# EAGLE board RedBot-Panel-v14 (EAGLE 6.5.0)
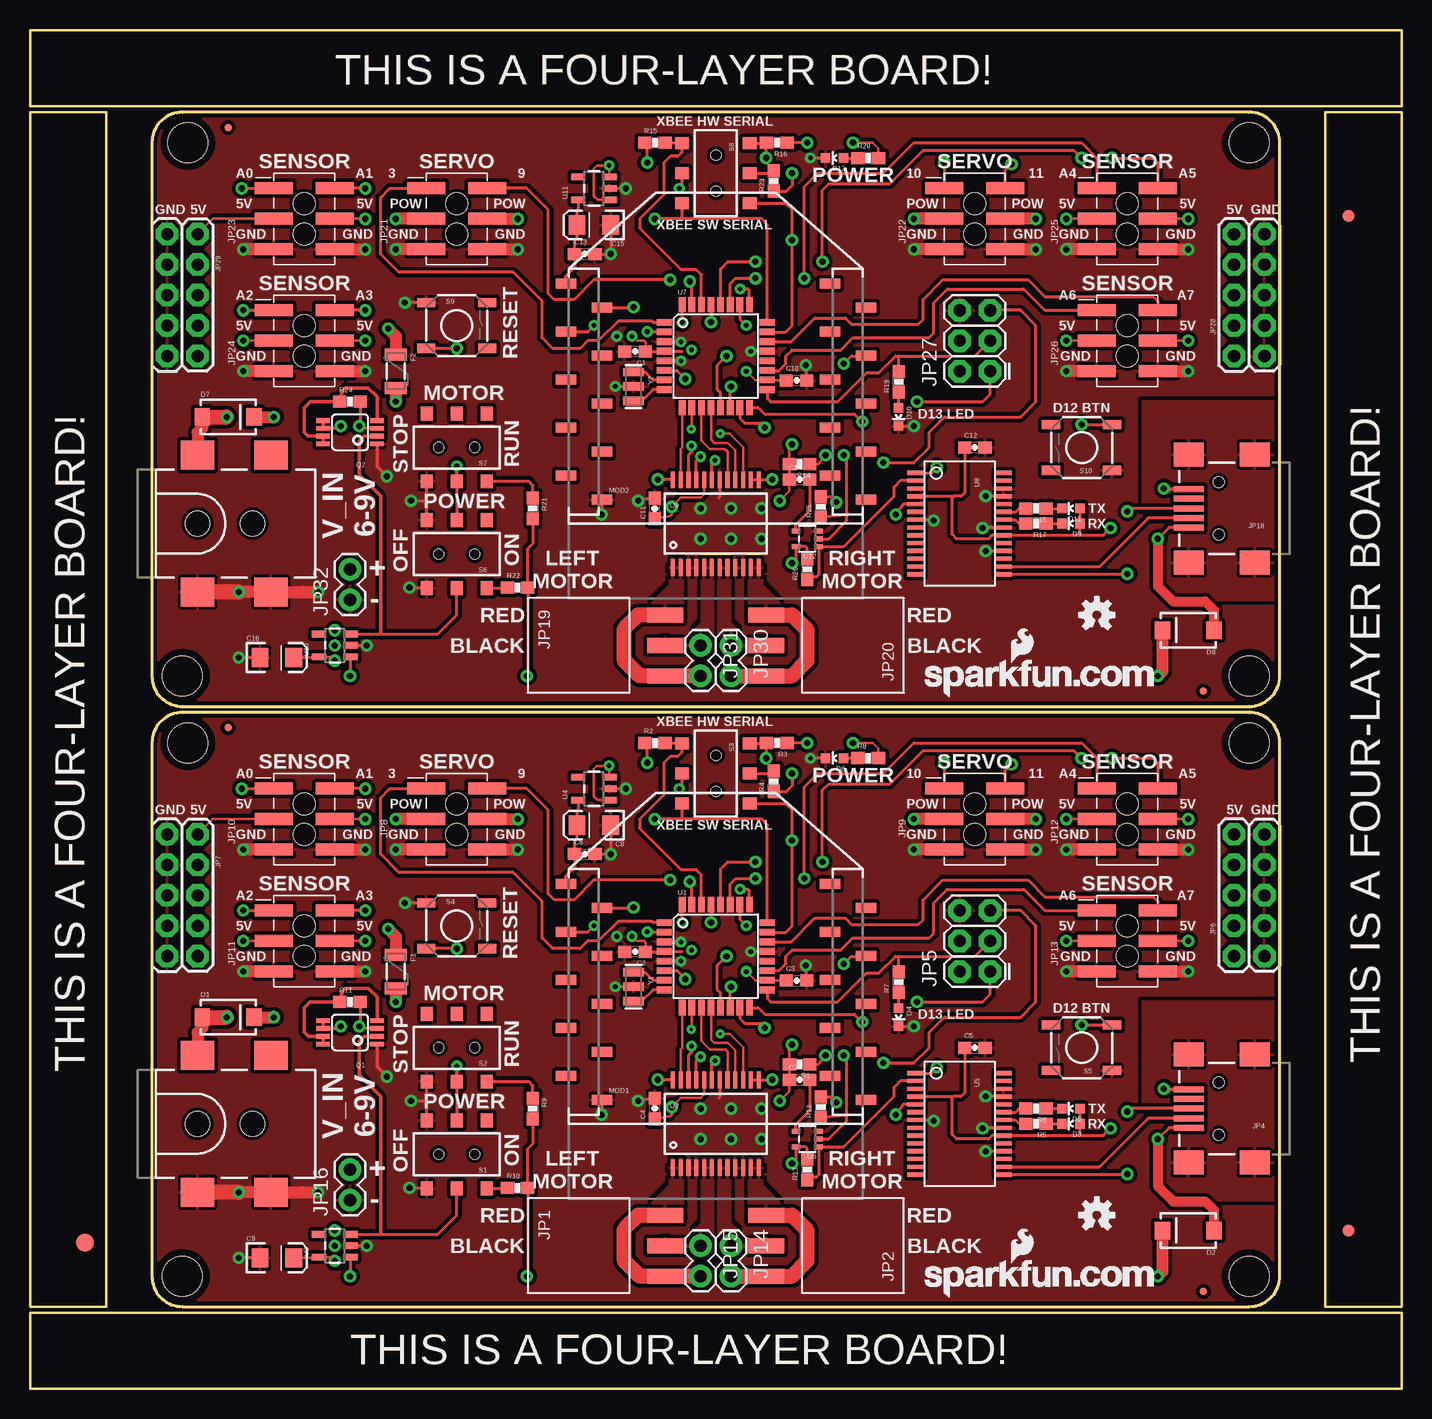
[diagram p0: board, top side]
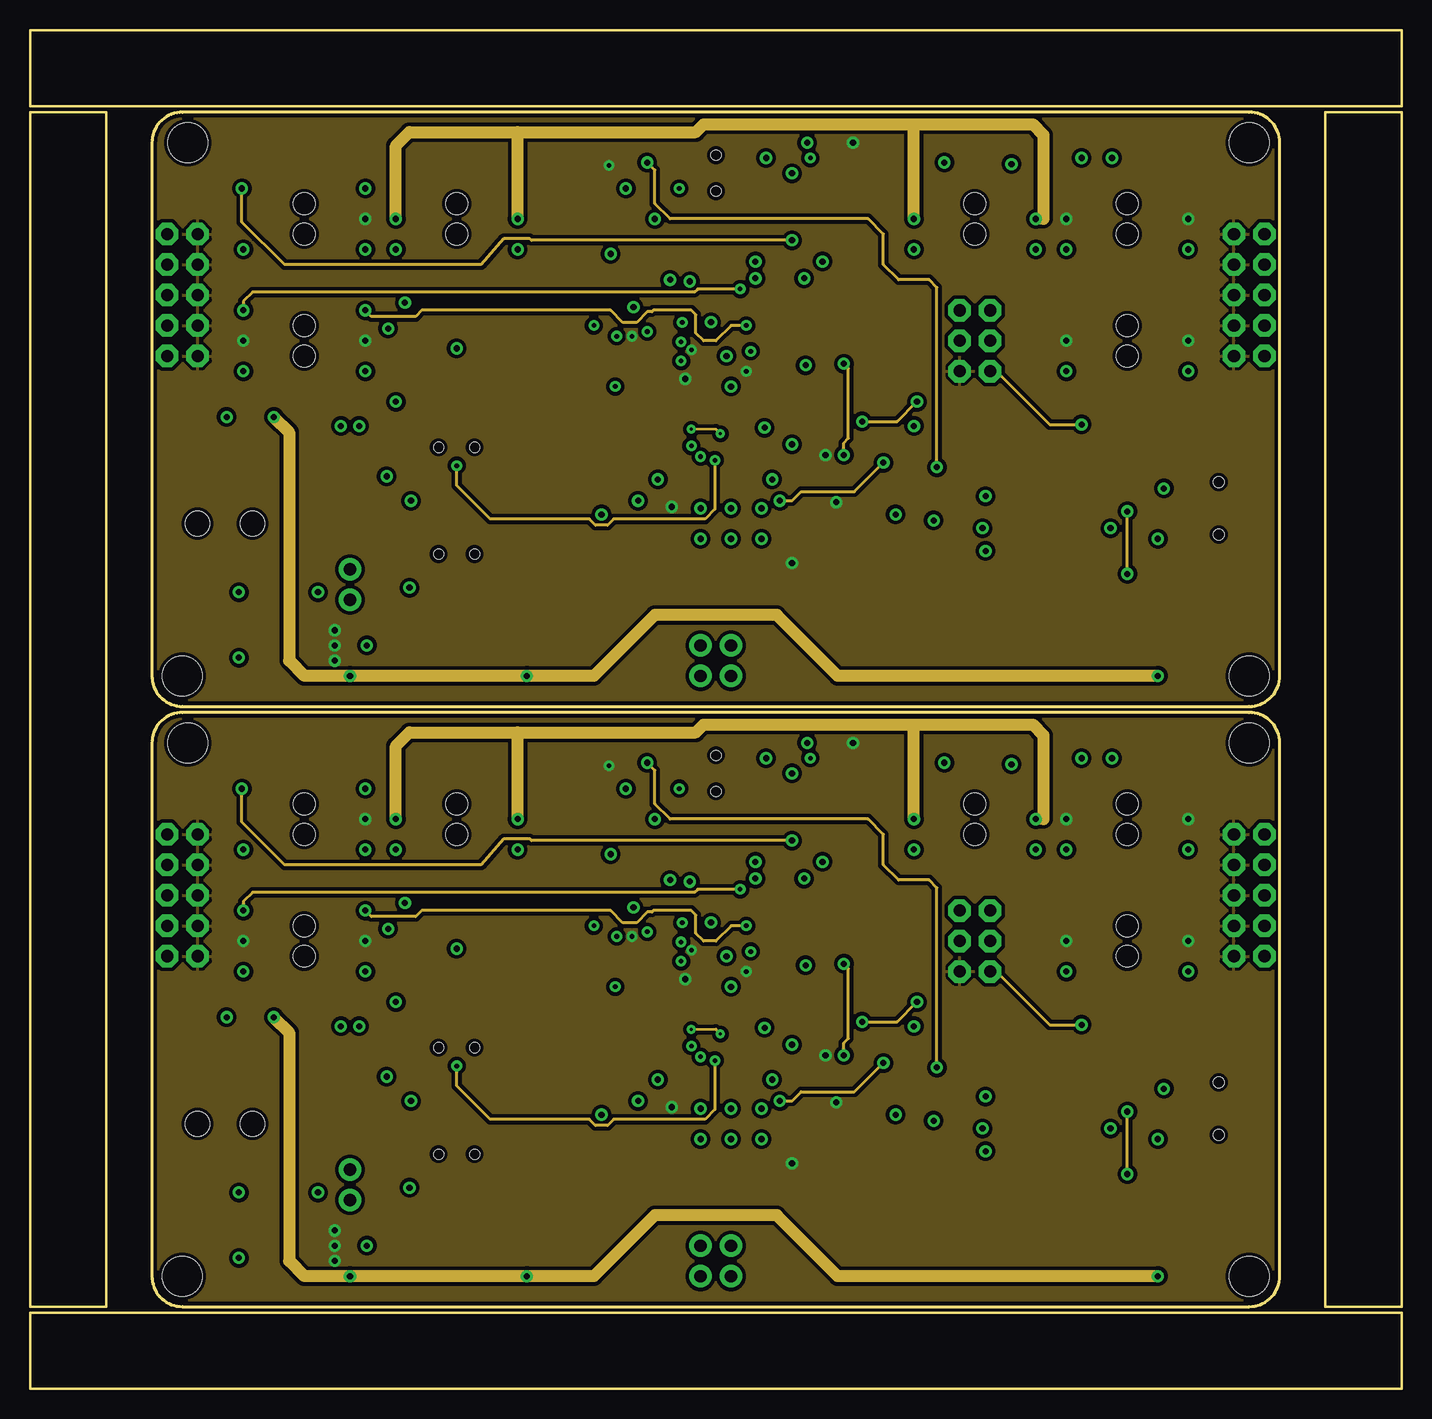
[diagram p1: board, inner layer 5V]
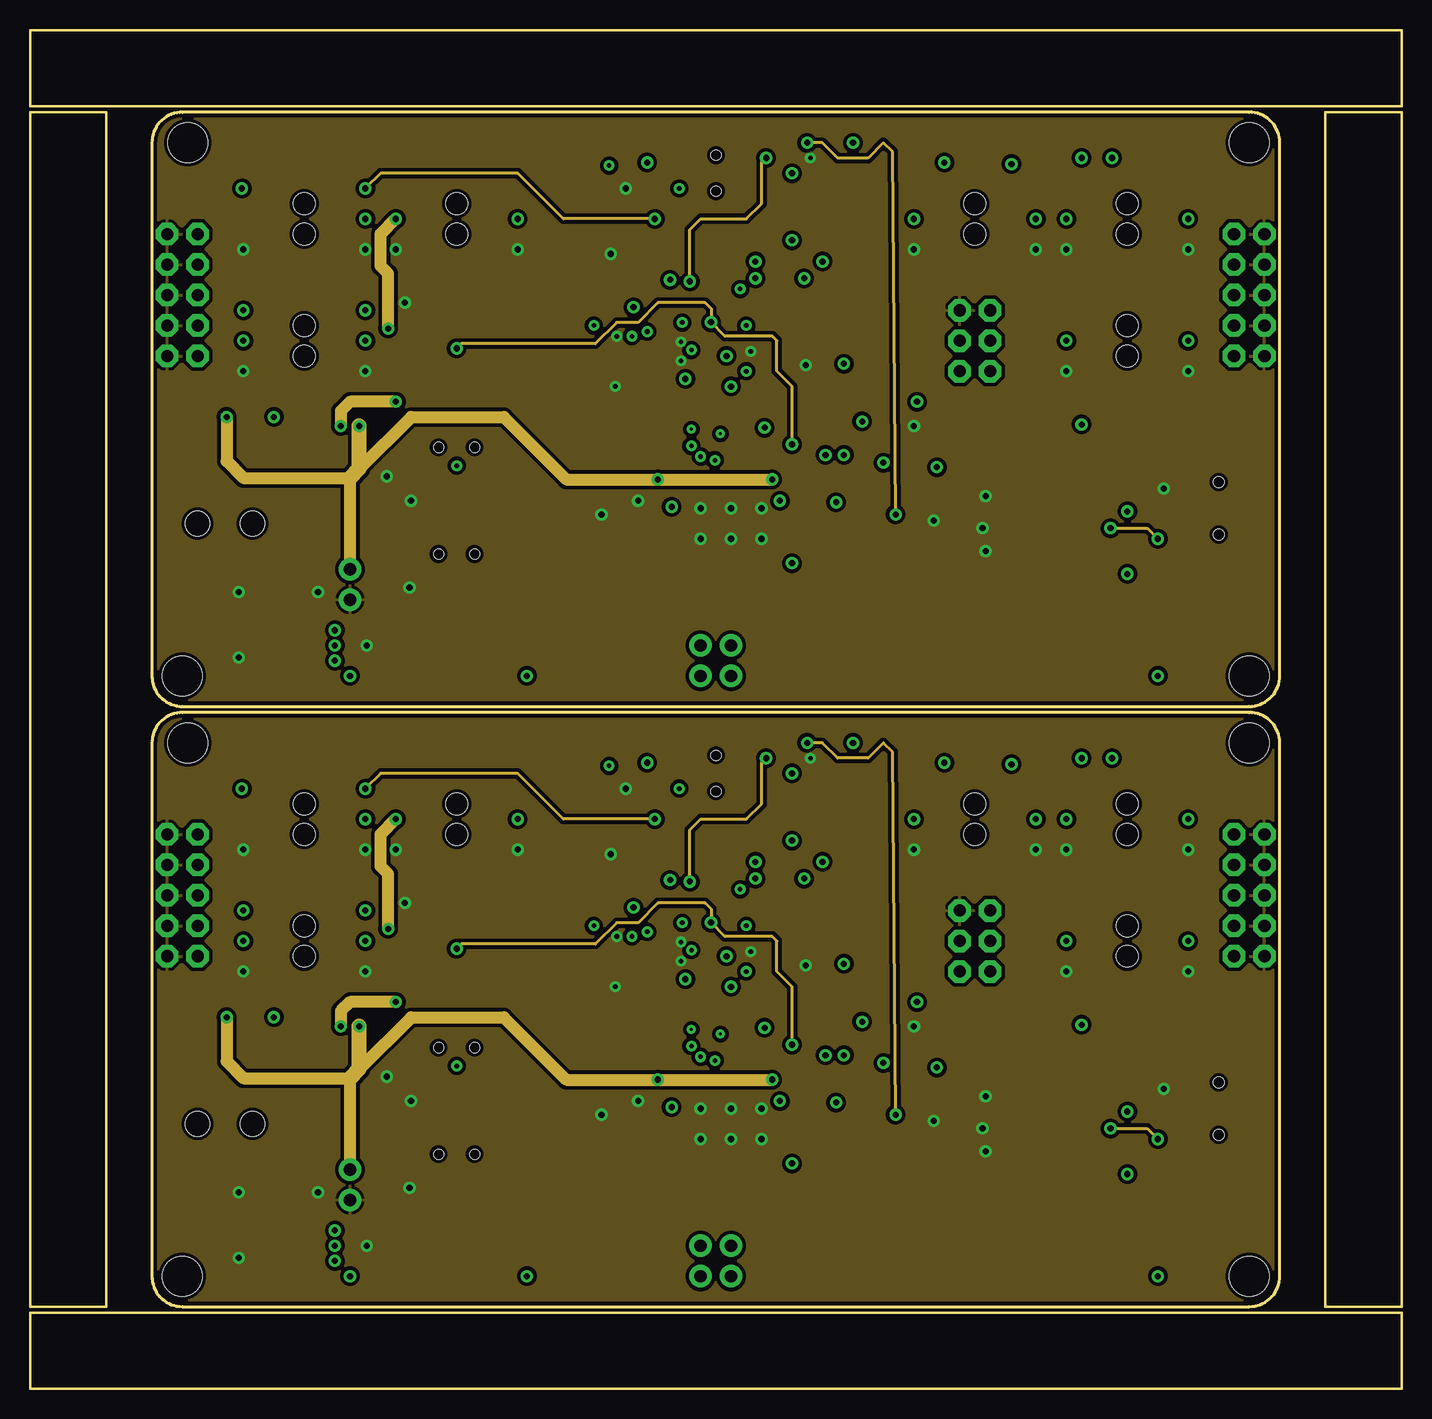
[diagram p2: board, inner layer Gnd]
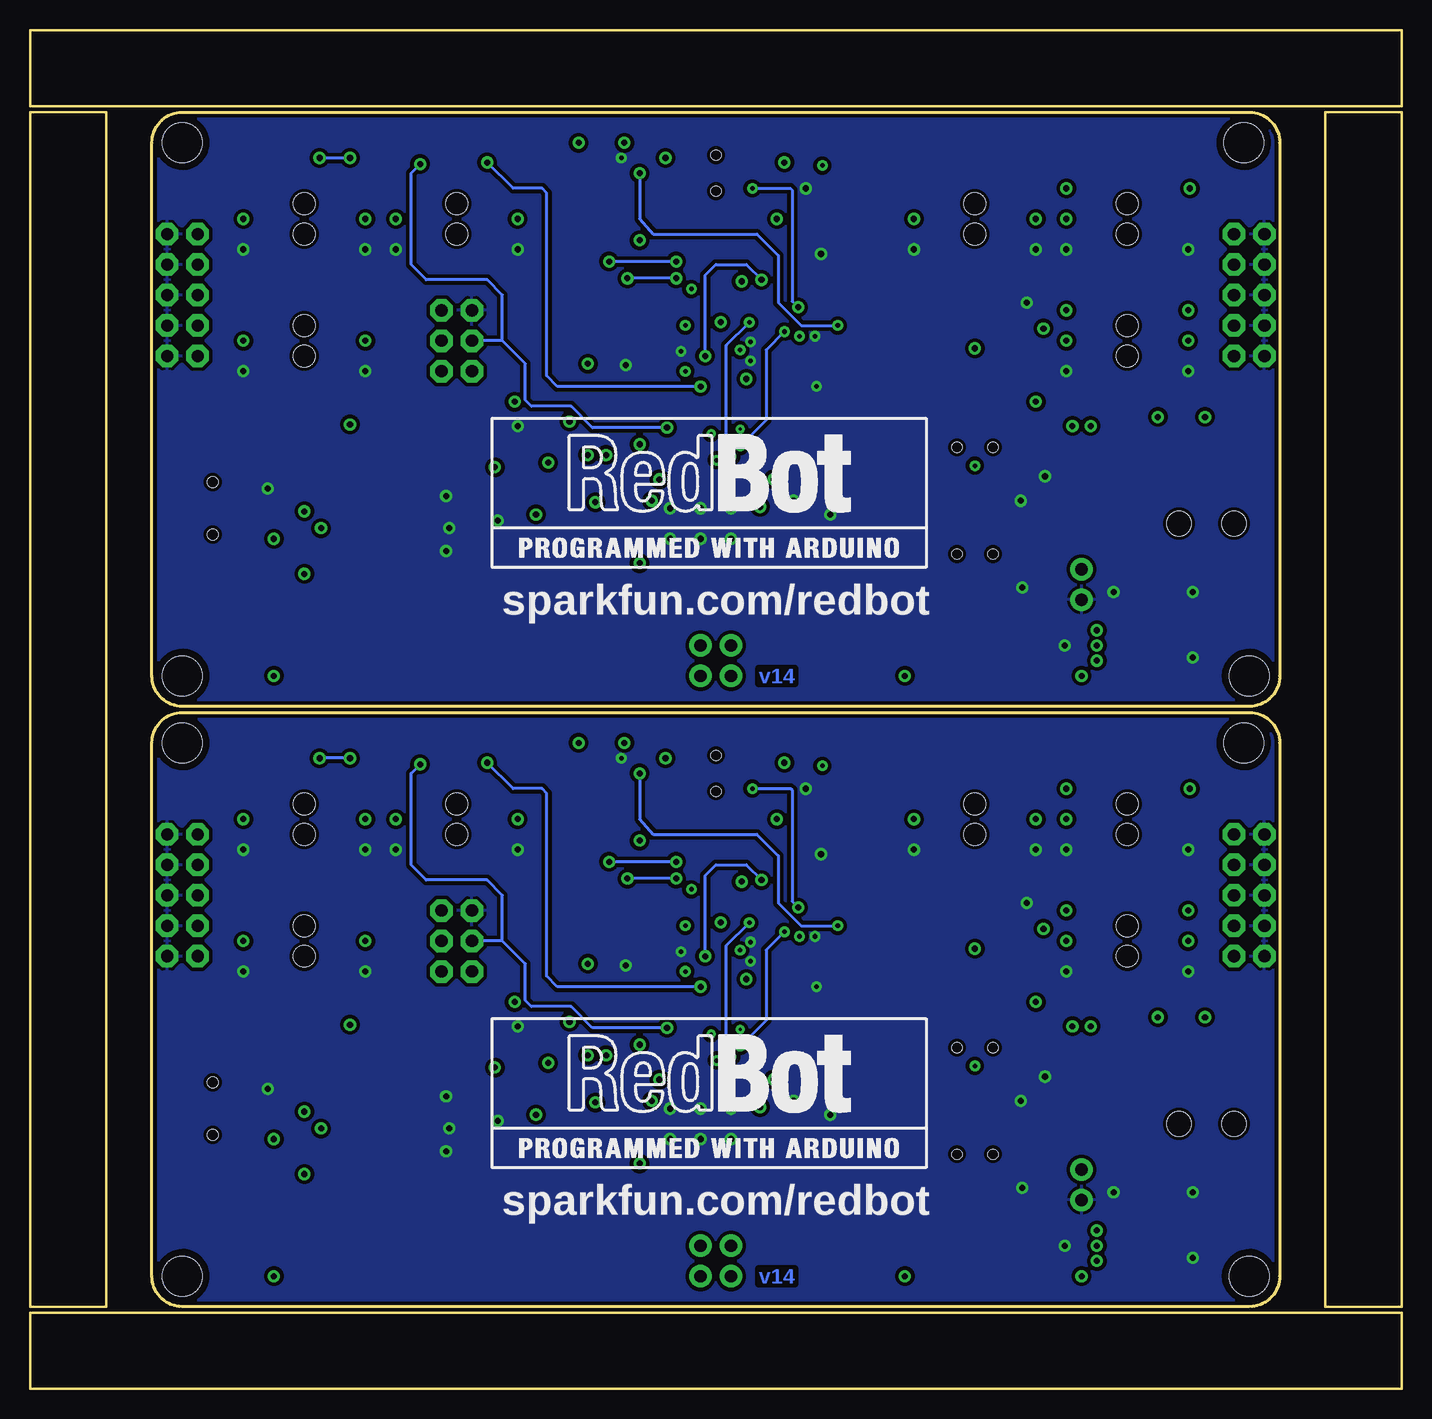
[diagram p3: board, bottom side, seen from below]

Size 114.3 x 113.28 mm. Coordinates in mm from the lower left corner, seen from the top.
Outline: 6.35,79.25 6.35,6.86 0,6.86 0,29.72
Outline: 114.3,79.25 114.3,6.86 107.95,6.86 107.95,29.72
Outline: 82.55,0 0,0 0,6.35 33.02,6.35
Outline: 31.75,6.35 114.3,6.35 114.3,0 81.28,0
Outline: 0,29.46 0,106.43 6.35,106.43 6.35,78.99
Outline: 107.95,29.21 107.95,106.43 114.3,106.43 114.3,78.74
Outline: 31.75,113.28 114.3,113.28 114.3,106.93 81.28,106.93
Outline: 82.55,106.93 0,106.93 0,113.28 33.02,113.28
Outline: 10.16,53.85 10.16,9.4 arc90 12.7,6.86 101.6,6.86 arc90 104.14,9.4 104.14,53.85 arc90 101.6,56.39 12.7,56.39 arc90 10.16,53.85
Outline: 10.16,103.89 10.16,59.44 arc90 12.7,56.9 101.6,56.9 arc90 104.14,59.44 104.14,103.89 arc90 101.6,106.43 12.7,106.43 arc90 10.16,103.89
Copper layers (1*2+15*16): Top 0.035mm / dielectric 1.5mm / 5V 0.035mm / dielectric 0.15mm / Gnd 0.035mm / dielectric 0.2mm / Bottom 0.035mm
Design rules "Sparkfun *": minimum track width 8mil, minimum drill 15mil, track to track 8mil, track to pad 8mil, pad to pad 8mil, via to via 8mil, smd to smd 8mil, copper to edge 8mil, drill to drill 8mil, minimum pad ring 12mil, minimum via ring 10mil, stop-mask expansion 4mil, vias tented up to drill 20mil, thermal gap 10mil

## Footprints (pad centres in the part's own frame; a part is rotated, then mirrored left to right if it is on the bottom)
0603-CAP = smd 1.1 x 1: 1 -0.85,0; 2 0.85,0
EIA3216 = smd 1.4 x 1.6: A 1.4,0; C -1.4,0
SMA-DIODE = smd 1.27 x 1.47: A -2.15,0; C 2.15,0
LED-0603 = smd 0.8 x 0.8: A 0,-0.75; C 0,0.75
FIDUCIAL-1.5X3 = smd 1.5 x 1.5: 1 0,0
FIDUCIAL-1X2 = smd 1 x 1: 1 0,0
PTC-1206 = smd 1 x 1.8: 1 -1.4,0; 2 1.4,0
MICRO-FIDUCIAL = smd 0.635 x 0.635: 1 0,0
1X03_SMD_RA_FEMALE = smd 1.25 x 3: 1 -2.54,7.225; 2 0,7.225; 3 2.54,7.225
POWER_JACK_SMD = smd 2.8 x 2.4: GND 0,-5.7; P$4 6.1,-5.7; VIN0 0,5.7; VIN1 6.1,5.7 | hole 2.032: 0,0; 4.572,0
USB-MINIB = smd 2.5 x 0.5: D+ 2.5,0; D- 2.5,0.8; GND 2.5,-1.6; ID 2.5,-0.8; VBUS 2.5,1.6 | smd 2.5 x 2: MTN1 -3,4.5; MTN2 2.5,4.5; MTN3 -3,-4.5; MTN4 2.5,-4.5 | hole 0.9: 0,2.2; 0,-2.2
2X3 = drill 1.016 pad 1.88 octagon: 1 0,0; 2 0,2.54; 3 2.54,0; 4 2.54,2.54; 5 5.08,0; 6 5.08,2.54
2X5_NOSILK = drill 1.016 pad 1.88 octagon: 1 -1.27,5.08; 2 1.27,5.08; 3 -1.27,2.54; 4 1.27,2.54; 5 -1.27,0; 6 1.27,0; 7 -1.27,-2.54; 8 1.27,-2.54; 9 -1.27,-5.08; 10 1.27,-5.08
2X3_SMT_POSTS = smd 1 x 3.17: 1 -2.54,-2.54; 2 -2.54,2.54; 3 0,-2.54; 4 0,2.54; 5 2.54,-2.54; 6 2.54,2.54 | hole 1.8: -1.27,0; 1.27,0
1X02 = drill 1.016 pad 1.88: 1 0,0; 2 2.54,0
XBEE-SMD = smd 1.7 x 0.85: 1 -12.5,20; 2 -9.5,18; 3 -12.5,16; 4 -9.5,14; 5 -12.5,12; 6 -9.5,10; 7 -12.5,8; 8 -9.5,6; 9 -12.5,4; 10 -9.5,2; 11 12.5,2; 12 9.5,4; 13 12.5,6; 14 9.5,8; 15 12.5,10; 16 9.5,12; 17 12.5,14; 18 9.5,16; 19 12.5,18; 20 9.5,20
MSOP8 = smd 0.4 x 1.1: 1 -0.975,-2.25; 2 -0.325,-2.25; 3 0.325,-2.25; 4 0.975,-2.25; 5 0.975,2.25; 6 0.325,2.25; 7 -0.325,2.25; 8 -0.975,2.25
0603-RES = smd 1.1 x 1: 1 -0.85,0; 2 0.85,0
AYZ0202 = smd 1 x 1.15: 1 -2.5,2.825; 2 0,2.825; 3 2.5,2.825; 4 -2.5,-2.825; 5 0,-2.825; 6 2.5,-2.825 | hole 0.85: 1.5,0; -1.5,0
TACTILE_SWITCH_SMD = smd 1.524 x 0.762: 1 -2.54,1.905; 2 2.54,1.905; 3 -2.54,-1.905; 4 2.54,-1.905
STAND-OFF = hole 3.302: 0,0
TQFP32-08 = smd 1.27 x 0.559: 1 -4.293,2.8; 2 -4.293,2; 3 -4.293,1.2; 4 -4.293,0.4; 5 -4.293,-0.4; 6 -4.293,-1.2; 7 -4.293,-2; 8 -4.293,-2.8; 17 4.293,-2.8; 18 4.293,-2; 19 4.293,-1.2; 20 4.293,-0.4; 21 4.293,0.4; 22 4.293,1.2; 23 4.293,2; 24 4.293,2.8 | smd 0.559 x 1.27: 9 -2.8,-4.293; 10 -2,-4.293; 11 -1.2,-4.293; 12 -0.4,-4.293; 13 0.4,-4.293; 14 1.2,-4.293; 15 2,-4.293; 16 2.8,-4.293; 25 2.8,4.293; 26 2,4.293; 27 1.2,4.293; 28 0.4,4.293; 29 -0.4,4.293; 30 -1.2,4.293; 31 -2,4.293; 32 -2.8,4.293
SSOP24 = smd 0.348 x 1.397: 1 -3.575,-3.656; 2 -2.925,-3.656; 3 -2.275,-3.656; 4 -1.625,-3.656; 5 -0.975,-3.656; 6 -0.325,-3.656; 7 0.325,-3.656; 8 0.975,-3.656; 9 1.625,-3.656; 10 2.275,-3.656; 11 2.925,-3.656; 12 3.575,-3.656; 13 3.575,3.656; 14 2.925,3.656; 15 2.275,3.656; 16 1.625,3.656; 17 0.975,3.656; 18 0.325,3.656; 19 -0.325,3.656; 20 -0.975,3.656; 21 -1.625,3.656; 22 -2.275,3.656; 23 -2.925,3.656; 24 -3.575,3.656
SOT23-5 = smd 0.55 x 1.2: 1 -0.95,-1.3; 2 0,-1.3; 3 0.95,-1.3; 4 0.95,1.3; 5 -0.95,1.3
SSOP28DB = smd 0.348 x 1.397: 1 -4.225,-3.656; 2 -3.575,-3.656; 3 -2.925,-3.656; 4 -2.275,-3.656; 5 -1.625,-3.656; 6 -0.975,-3.656; 7 -0.325,-3.656; 8 0.325,-3.656; 9 0.975,-3.656; 10 1.625,-3.656; 11 2.275,-3.656; 12 2.925,-3.656; 13 3.575,-3.656; 14 4.225,-3.656; 15 4.225,3.656; 16 3.575,3.656; 17 2.925,3.656; 18 2.275,3.656; 19 1.625,3.656; 20 0.975,3.656; 21 0.325,3.656; 22 -0.325,3.656; 23 -0.975,3.656; 24 -1.625,3.656; 25 -2.275,3.656; 26 -2.925,3.656; 27 -3.575,3.656; 28 -4.225,3.656
SOT353 = smd 0.42 x 0.7: 1 -0.65,-0.95; 2 0,-0.95; 3 0.65,-0.95; 4 0.65,0.95; 5 -0.65,0.95
RESONATOR-SMD = smd 0.7 x 1.7: 1 -1.2,0; 2 0,0; 3 1.2,0

## Placement (x,y rotation side)
C1  0.1uF  [0603-CAP]  50.42,86.49 180 top
C2  0.1uF  [0603-CAP]  50.42,36.45 180 top
C3  0.1uF  [0603-CAP]  63.88,34.04 0 top
C4  0.1uF  [0603-CAP]  52.07,23.37 90 top
C5  0.1uF  [0603-CAP]  78.74,28.45 0 top
C6  0.1uF  [0603-CAP]  46.23,44.58 0 top
C7  0.1uF  [0603-CAP]  64.14,25.78 0 top
C8  10uF  [EIA3216]  46.99,46.99 180 top
C9  10uF  [EIA3216]  20.57,10.92 0 top
C10  0.1uF  [0603-CAP]  63.88,84.07 0 top
C11  0.1uF  [0603-CAP]  52.07,73.41 90 top
C12  0.1uF  [0603-CAP]  78.74,78.49 0 top
C13  0.1uF  [0603-CAP]  46.23,94.61 0 top
C14  0.1uF  [0603-CAP]  64.14,75.82 0 top
C15  10uF  [EIA3216]  46.99,97.03 180 top
C16  10uF  [EIA3216]  20.57,60.96 0 top
D1  [SMA-DIODE]  16.51,30.99 0 top
D2  [SMA-DIODE]  96.52,13.21 180 top
D3  GREEN  [LED-0603]  86.74,22.1 90 top
D4  GREEN  [LED-0603]  72.39,30.99 180 top
D5  GREEN  [LED-0603]  86.74,23.37 90 top
D6  GREEN  [LED-0603]  67.06,52.58 90 top
D7  [SMA-DIODE]  16.51,81.03 0 top
D8  [SMA-DIODE]  96.52,63.25 180 top
D9  GREEN  [LED-0603]  86.74,72.14 90 top
D10  GREEN  [LED-0603]  72.39,81.03 180 top
D11  GREEN  [LED-0603]  86.74,73.41 90 top
D12  GREEN  [LED-0603]  67.06,102.62 90 top
E$1  [FIDUCIAL-1.5X3]  4.57,12.19 0 top
E$2  [FIDUCIAL-1X2]  109.86,13.21 0 top
E$6  [FIDUCIAL-1X2]  109.86,97.79 180 top
F1  PTCSMD  [PTC-1206]  30.48,34.8 270 top
F2  PTCSMD  [PTC-1206]  30.48,84.84 270 top
FID1  FIDUCIALUFIDUCIAL  [MICRO-FIDUCIAL]  16.51,55.12 0 top
FID2  FIDUCIALUFIDUCIAL  [MICRO-FIDUCIAL]  97.79,8.13 0 top
FID3  FIDUCIALUFIDUCIAL  [MICRO-FIDUCIAL]  16.51,105.16 0 top
FID4  FIDUCIALUFIDUCIAL  [MICRO-FIDUCIAL]  97.79,58.17 0 top
JP1  1x3 RA Female .1"  [1X03_SMD_RA_FEMALE]  45.72,11.94 270 top
JP2  1x3 RA Female .1"  [1X03_SMD_RA_FEMALE]  68.58,11.94 90 top
JP3  5.5x2.1mm Barrel  [POWER_JACK_SMD]  13.97,22.1 0 top
JP4  USB-B  [USB-MINIB]  99.06,23.37 180 top
JP5  AVR_SPI_PRG_6PTH  [2X3]  80.01,34.8 90 top
JP6  M05X2NO_SILK  [2X5_NOSILK]  101.6,41.15 0 top
JP7  M05X2NO_SILK  [2X5_NOSILK]  12.7,41.15 180 top
JP8  [2X3_SMT_POSTS]  35.56,47.5 270 top
JP9  [2X3_SMT_POSTS]  78.74,47.5 270 top
JP10  [2X3_SMT_POSTS]  22.86,47.5 270 top
JP11  [2X3_SMT_POSTS]  22.86,37.34 270 top
JP12  [2X3_SMT_POSTS]  91.44,47.5 270 top
JP13  [2X3_SMT_POSTS]  91.44,37.34 270 top
JP14  [1X02]  58.42,11.94 270 top
JP15  [1X02]  55.88,11.94 270 top
JP16  [1X02]  26.67,15.75 90 top
JP17  5.5x2.1mm Barrel  [POWER_JACK_SMD]  13.97,72.14 0 top
JP18  USB-B  [USB-MINIB]  99.06,73.41 180 top
JP19  1x3 RA Female .1"  [1X03_SMD_RA_FEMALE]  45.72,61.98 270 top
JP20  1x3 RA Female .1"  [1X03_SMD_RA_FEMALE]  68.58,61.98 90 top
JP21  [2X3_SMT_POSTS]  35.56,97.54 270 top
JP22  [2X3_SMT_POSTS]  78.74,97.54 270 top
JP23  [2X3_SMT_POSTS]  22.86,97.54 270 top
JP24  [2X3_SMT_POSTS]  22.86,87.38 270 top
JP25  [2X3_SMT_POSTS]  91.44,97.54 270 top
JP26  [2X3_SMT_POSTS]  91.44,87.38 270 top
JP27  AVR_SPI_PRG_6PTH  [2X3]  80.01,84.84 90 top
JP28  M05X2NO_SILK  [2X5_NOSILK]  101.6,91.19 0 top
JP29  M05X2NO_SILK  [2X5_NOSILK]  12.7,91.19 180 top
JP30  [1X02]  58.42,61.98 270 top
JP31  [1X02]  55.88,61.98 270 top
JP32  [1X02]  26.67,65.79 90 top
MOD1  XBEE-1B3  [XBEE-SMD]  57.15,22.1 0 top
MOD2  XBEE-1B3  [XBEE-SMD]  57.15,72.14 0 top
Q1  [MSOP8]  26.67,29.72 90 top
Q2  [MSOP8]  26.67,79.76 90 top
R1  10k  [0603-RES]  64.14,27.05 180 top
R2  1k  [0603-RES]  52.07,53.85 0 top
R3  1k  [0603-RES]  62.23,53.85 180 top
R4  1k  [0603-RES]  61.98,50.67 90 top
R5  1k  [0603-RES]  83.82,22.1 180 top
R6  1k  [0603-RES]  83.82,23.37 180 top
R7  1k  [0603-RES]  72.39,33.91 90 top
R8  1k  [0603-RES]  69.85,52.58 0 top
R9  10k  [0603-RES]  41.91,23.37 270 top
R10  10k  [0603-RES]  40.64,16.76 0 top
R11  10k  [0603-RES]  26.67,32.26 0 top
R12  10k  [0603-RES]  65.91,23.5 90 top
R13  10k  [0603-RES]  64.77,18.29 90 top
R14  10k  [0603-RES]  64.14,77.09 180 top
R15  1k  [0603-RES]  52.07,103.89 0 top
R16  1k  [0603-RES]  62.23,103.89 180 top
R17  1k  [0603-RES]  83.82,72.14 180 top
R18  1k  [0603-RES]  83.82,73.41 180 top
R19  1k  [0603-RES]  72.39,83.95 90 top
R20  1k  [0603-RES]  69.85,102.62 0 top
R21  10k  [0603-RES]  41.91,73.41 270 top
R22  10k  [0603-RES]  40.64,66.8 0 top
R23  1k  [0603-RES]  61.98,100.71 90 top
R24  10k  [0603-RES]  26.67,82.3 0 top
R25  10k  [0603-RES]  65.91,73.53 90 top
R26  10k  [0603-RES]  64.77,68.33 90 top
S1  DPDT  [AYZ0202]  35.56,19.56 180 top
S2  DPDT  [AYZ0202]  35.56,28.45 180 top
S3  DPDT  [AYZ0202]  57.15,51.31 270 top
S4  [TACTILE_SWITCH_SMD]  35.56,38.61 0 top
S5  [TACTILE_SWITCH_SMD]  87.63,28.45 180 top
S6  DPDT  [AYZ0202]  35.56,69.6 180 top
S7  DPDT  [AYZ0202]  35.56,78.49 180 top
S8  DPDT  [AYZ0202]  57.15,101.35 270 top
S9  [TACTILE_SWITCH_SMD]  35.56,88.65 0 top
S10  [TACTILE_SWITCH_SMD]  87.63,78.49 180 top
SFE-LOGO1  LOGO-SFENEW  [SFE-NEW-WEBLOGO]  74.55,7.62 0 top
SFE-LOGO2  LOGO-SFENEW  [SFE-NEW-WEBLOGO]  74.55,57.66 0 top
STANDOFF1  STAND-OFF  [STAND-OFF]  101.6,9.4 0 top
STANDOFF2  STAND-OFF  [STAND-OFF]  13.15,53.85 0 top
STANDOFF3  STAND-OFF  [STAND-OFF]  12.7,9.4 0 top
STANDOFF4  STAND-OFF  [STAND-OFF]  101.6,53.85 0 top
STANDOFF5  STAND-OFF  [STAND-OFF]  101.6,59.44 0 top
STANDOFF6  STAND-OFF  [STAND-OFF]  13.15,103.89 0 top
STANDOFF7  STAND-OFF  [STAND-OFF]  12.7,59.44 0 top
STANDOFF8  STAND-OFF  [STAND-OFF]  101.6,103.89 0 top
U1  ATMEGA328P  [TQFP32-08]  57.15,36.07 0 top
U2  TB6612FNG  [SSOP24]  57.15,22.1 0 top
U3  MIC5219 5V  [SOT23-5]  25.4,11.94 90 top
U4  MIC5219 3.3V  [SOT23-5]  46.99,50.04 90 top
U5  FT232RLSSOP  [SSOP28DB]  77.47,22.1 270 top
U6  7408SE  [SOT353]  64.77,20.83 90 top
U7  ATMEGA328P  [TQFP32-08]  57.15,86.11 0 top
U8  FT232RLSSOP  [SSOP28DB]  77.47,72.14 270 top
U9  TB6612FNG  [SSOP24]  57.15,72.14 0 top
U10  MIC5219 5V  [SOT23-5]  25.4,61.98 90 top
U11  MIC5219 3.3V  [SOT23-5]  46.99,100.08 90 top
U12  7408SE  [SOT353]  64.77,70.87 90 top
U$1  OSHW-LOGOS  [OSHW-LOGO-S]  88.9,64.52 0 top
U$2  REDBOT_LOGO  [REDBOT_LOGO]  75.95,68.33 0 bottom
U$17  OSHW-LOGOS  [OSHW-LOGO-S]  88.9,14.48 0 top
U$23  REDBOT_LOGO  [REDBOT_LOGO]  75.95,18.29 0 bottom
Y1  16MHz  [RESONATOR-SMD]  50.29,33.53 270 top
Y2  16MHz  [RESONATOR-SMD]  50.29,83.57 270 top

## Library data of the parts
C1-C7 C10-C14 = SparkFun-Capacitors; PROD_ID: CAP-00810
C8 C9 C15 C16 = SparkFun-Capacitors; PROD_ID: CAP-00811
D1 D2 D7 D8 = SparkFun-DiscreteSemi; PROD_ID: DIO-09886
D3-D6 D9-D12 = SparkFun-LED; PROD_ID: DIO-00821
E$1 E$2 E$6 FID1-FID4 SFE-LOGO1 SFE-LOGO2 U$1 U$2 U$17 U$23 = SparkFun-Aesthetics
F1 F2 = SparkFun-PowerIC; PROD_ID: RES-11150
JP1 JP2 JP19 JP20 = SparkFun-Connectors; PROD_ID: CONN-10926
JP3 JP17 = SparkFun-Connectors; PROD_ID: CONN-08106
JP4-JP7 JP14-JP16 JP18 JP27-JP32 = SparkFun-Connectors
JP8-JP13 JP21-JP26 = SparkFun-Connectors; PROD_ID: CONN-11415
MOD1 MOD2 = SparkFun-RF; PROD_ID: CONN-09042
Q1 Q2 = SparkFun-DiscreteSemi; PROD_ID: TRANS-07913
R1 R9-R14 R21 R22 R24-R26 = SparkFun-Resistors; PROD_ID: RES-00824
R2-R8 R15-R20 R23 = SparkFun-Resistors; PROD_ID: RES-07856
S1-S3 S6-S8 = SparkFun-Electromechanical; PROD_ID: SWCH-08179
S4 S5 S9 S10 = SparkFun-Electromechanical; PROD_ID: SWCH-08247
STANDOFF1-STANDOFF8 = SparkFun-Electromechanical
U1 U7 = SparkFun-DigitalIC; PROD_ID: IC-09069
U2 U9 = SparkFun-PowerIC; PROD_ID: IC-09363
U3 U10 = SparkFun-PowerIC; PROD_ID: VREG-10107
U4 U11 = SparkFun-PowerIC; PROD_ID: VREG-09872
U5 U8 = SparkFun-DigitalIC; PROD_ID: IC-00870
U6 U12 = SparkFun-DigitalIC; PROD_ID: IC-10841
Y1 Y2 = SparkFun-FreqCtrl; PROD_ID: XTAL-08900

## Nets
3.3V: C6.1 C8.A MOD1.1 U4.5
3.3V1: C13.1 C15.A MOD2.1 U11.5
5V: C2.1 C3.1 C4.1 C9.A JP5.2 JP6.1 JP6.3 JP6.5 JP6.7 JP6.9 JP7.1 JP7.3 JP7.5 JP7.7 JP7.9 JP10.3 JP10.4 JP11.3 JP11.4 JP12.3 JP12.4 JP13.3 JP13.4 R1.1 R8.2 R12.2 R13.2 U1.4 U1.6 U1.18 U2.20 U3.5 U4.1 U4.3 U6.5
5V1: C1.1 C10.1 C11.1 C16.A JP23.3 JP23.4 JP24.3 JP24.4 JP25.3 JP25.4 JP26.3 JP26.4 JP27.2 JP28.1 JP28.3 JP28.5 JP28.7 JP28.9 JP29.1 JP29.3 JP29.5 JP29.7 JP29.9 R14.1 R20.2 R25.2 R26.2 U7.4 U7.6 U7.18 U9.20 U10.5 U11.1 U11.3 U12.5
AREF: U1.20
AREF1: U7.20
FT232_RXI: R3.1 U5.5
FT232_RXI1: R16.1 U8.5
FT232_TXO: R2.1 U5.1
FT232_TXO1: R15.1 U8.1
FTDI_DTR: R13.1 U5.2 U6.1
FTDI_DTR1: R26.1 U8.2 U12.1
GND: C2.2 C3.2 C4.2 C5.2 C6.2 C8.C C9.C D4.C D6.C JP3.GND JP3.P$4 JP4.GND JP5.6 JP6.2 JP6.4 JP6.6 JP6.8 JP6.10 JP7.2 JP7.4 JP7.6 JP7.8 JP7.10 JP8.5 JP8.6 JP9.5 JP9.6 JP10.5 JP10.6 JP11.5 JP11.6 JP12.5 JP12.6 JP13.5 JP13.6 JP16.1 MOD1.10 Q1.1 S1.3 S1.6 S2.3 S4.1 S5.1 U1.3 U1.5 U1.21 U2.3 U2.4 U2.9 U2.10 U2.18 U3.2 U4.2 U5.7 U5.18 U5.21 U5.25 U5.26 U6.3 Y1.2
GND1: C1.2 C10.2 C11.2 C12.2 C13.2 C15.C C16.C D10.C D12.C JP17.GND JP17.P$4 JP18.GND JP21.5 JP21.6 JP22.5 JP22.6 JP23.5 JP23.6 JP24.5 JP24.6 JP25.5 JP25.6 JP26.5 JP26.6 JP27.6 JP28.2 JP28.4 JP28.6 JP28.8 JP28.10 JP29.2 JP29.4 JP29.6 JP29.8 JP29.10 JP32.1 MOD2.10 Q2.1 S6.3 S6.6 S7.3 S9.1 S10.1 U7.3 U7.5 U7.21 U8.7 U8.18 U8.21 U8.25 U8.26 U9.3 U9.4 U9.9 U9.10 U9.18 U10.2 U11.2 U12.3 Y2.2
L01: JP1.1 JP1.3 JP15.2 U2.1 U2.2
L02: JP1.2 JP15.1 U2.5 U2.6
L03: JP19.1 JP19.3 JP31.2 U9.1 U9.2
L04: JP19.2 JP31.1 U9.5 U9.6
L_CTRL_1: U1.32 U2.21
L_CTRL_2: U1.2 U2.22
L_CTRL_3: U7.2 U9.22
L_CTRL_4: U7.32 U9.21
MISO: JP5.1 S5.3 U1.16
MISO1: JP27.1 S10.3 U7.16
MOTOR_ENABLE: S1.5 S2.2 U2.19
MOTOR_ENABLE1: S6.5 S7.2 U9.19
N$1: R4.2 S3.2
N$2: Q1.4 Q1.7 Q1.8 R11.1
N$3: D5.C R6.1
N$4: D3.C R5.1
N$5: C7.2 U6.4
N$6: JP4.MTN1 JP4.MTN2 JP4.MTN3 JP4.MTN4
N$7: D4.A R7.1
N$8: D6.A R8.1
N$9: F1.2 Q1.5 Q1.6
N$10: JP18.D- U8.16
N$11: JP18.D+ U8.15
N$12: U7.8 Y2.3
N$13: U7.7 Y2.1
N$14: D10.A R19.1
N$15: D12.A R20.1
N$16: R21.1 S7.1
N$17: C14.2 U12.4
N$18: R9.1 S2.1
N$19: R23.2 S8.2
N$20: JP18.MTN1 JP18.MTN2 JP18.MTN3 JP18.MTN4
N$21: Q2.4 Q2.7 Q2.8 R24.1
N$22: D11.C R18.1
N$23: U1.8 Y1.3
N$24: U1.7 Y1.1
N$25: D9.C R17.1
N$26: JP4.D- U5.16
N$27: JP4.D+ U5.15
N$28: F2.2 Q2.5 Q2.6
PG_EN: R10.1 S1.1
PG_EN1: R22.1 S6.1
PROGRAM_ENABLE: Q1.2 S1.2 U3.3
PROGRAM_ENABLE1: Q2.2 S6.2 U10.3
PWML: U1.9 U2.23
PWML1: U7.9 U9.23
PWMR: U1.10 U2.15
PWMR1: U7.10 U9.15
R01: JP2.1 JP2.3 JP14.2 U2.11 U2.12
R02: JP2.2 JP14.1 U2.7 U2.8
R03: JP20.2 JP30.1 U9.7 U9.8
R04: JP20.1 JP20.3 JP30.2 U9.11 U9.12
R_CTRL_1: U1.11 U2.17
R_CTRL_2: U1.12 U2.16
R_CTRL_3: U7.11 U9.17
R_CTRL_4: U7.12 U9.16
RESET: C7.1 JP5.5 R1.2 S4.3 U1.29
RESET1: C14.1 JP27.5 R14.2 S9.3 U7.29
RXI: R2.2 S3.4 U1.30
RXI1: R15.2 S8.4 U7.30
RXLED: R5.2 U5.22
RXLED1: R17.2 U8.22
SCK: JP5.3 R7.2 U1.17
SCK1: JP27.3 R19.2 U7.17
SENSOR_0/SW_TXO: JP10.1 S3.3 U1.23
SENSOR_0/SW_TXO1: JP23.1 S8.3 U7.23
SENSOR_1: JP24.1 U7.25
SENSOR_1/SW_RXI: JP10.2 S3.6 U1.24
SENSOR_1/SW_RXI1: JP23.2 S8.6 U7.24
SENSOR_2: JP11.1 U1.25
SENSOR_3: JP11.2 U1.26
SENSOR_4: JP12.1 U1.27
SENSOR_5: JP12.2 U1.28
SENSOR_6: JP13.1 U1.19
SENSOR_7: JP13.2 U1.22
SENSOR_8: JP24.2 U7.26
SENSOR_9: JP25.1 U7.27
SENSOR_10: JP25.2 U7.28
SENSOR_11: JP26.1 U7.19
SENSOR_12: JP26.2 U7.22
SERVO_1: JP8.1 U1.1
SERVO_2: JP8.2 U1.13
SERVO_3: JP9.1 U1.14
SERVO_4: JP21.1 U7.1
SERVO_4/MOSI: JP5.4 JP9.2 U1.15
SERVO_4/MOSI1: JP22.2 JP27.4 U7.15
SERVO_5: JP21.2 U7.13
SERVO_6: JP22.1 U7.14
TXLED: R6.2 U5.23
TXLED1: R18.2 U8.23
TXO: R3.2 S3.1 U1.31
TXO1: R16.2 S8.1 U7.31
V_BATT: D1.A JP3.VIN0 JP16.2 Q1.3 R11.2 U2.13 U2.14 U2.24
V_BATT1: D7.A JP17.VIN0 JP32.2 Q2.3 R24.2 U9.13 U9.14 U9.24
V_GATED: F1.1 JP8.3 JP8.4 JP9.3 JP9.4
V_GATED1: F2.1 JP21.3 JP21.4 JP22.3 JP22.4
V_IN: D1.C D2.C R9.2 R10.2 U3.1
V_IN1: D7.C D8.C R21.2 R22.2 U10.1
V_USB: C5.1 D2.A D3.A D5.A JP4.VBUS U5.4 U5.20
V_USB1: C12.1 D8.A D9.A D11.A JP18.VBUS U8.4 U8.20
XBEE_DIO1: MOD2.17 R25.1 U12.2
XBEE_DIO3: MOD1.17 R12.1 U6.2
XBEE_RXI: MOD1.3 R4.1
XBEE_RXI1: MOD2.3 R23.1
XBEE_TXO: MOD1.2 S3.5
XBEE_TXO1: MOD2.2 S8.5

## Tracks (layer width: path | path; a pad name or v marks a point on that pad's centre or on a via)
3.3V
  Top 0.254: U4.5 45.69,48.36 45.59,48.26 C8.A 45.58,46.98 45.58,45.83 45.38,45.63 C6.1 45.38,43.47 44.65,42.74 MOD1.1
3.3V1
  Top 0.254: U11.5 45.69,98.39 45.59,98.3 C15.A 45.58,97.02 45.58,95.87 45.38,95.67 C13.1 45.38,93.51 44.65,92.78 MOD2.1
5V  (via drill 0.38, 0.51)
  Top 0.203: v50.16,37.72 50.55,37.34 51.18,37.34 51.32,37.2 51.32,36.5 C2.1 | U4.3 48.29,51.91 v48.26,51.94 47.24,51.94 46.99,51.69 46.99,49.4 47.3,49.09 U4.1 | v68.58,53.85 70.23,53.85 70.7,53.38 R8.2 | JP12.3 v86.36,47.5 | JP12.4 v96.52,47.5 | JP13.3 v86.36,37.34 | JP13.4 v96.52,37.34 | U2.20 56.17,24.55 55.88,24.26 54.23,24.26 v53.47,23.5 53.47,22.86 53.33,22.72 C4.1 | JP10.3 15.24,47.5 JP7.9 | v27.94,47.5 JP10.4 | JP11.3 v17.78,37.34 | JP11.4 v27.94,37.34 | C9.A 24.03,10.92 U3.5 25.08,10.99 v25.4,10.67 | v59.69,34.8 60.42,34.07 U1.18 62.33,34.07 62.36,34.04 C3.1 | v66.29,27.81 65.67,27.05 R1.1
  Top 0.254: C2.1 52.84,36.45 U1.4 54.35,36.47 | U1.6 53.91,34.87 v54.61,34.16 | v63.5,18.8 63.82,19.12 U6.5 63.84,20.19 64.64,20.19 64.77,20.07 R13.2 | R12.2 66.71,24.34 v67.18,23.88
  other vias: 25.4,11.94 25.4,13.21 55.12,36.58
  pour 5V (isolate 0.305): 12.7,56.39 101.6,56.39 arc-90 104.14,53.85 104.14,9.4 arc-90 101.6,6.86 12.7,6.86 arc-90 10.16,9.4 10.16,53.85 arc-90
5V1  (via drill 0.38, 0.51)
  Top 0.203: v50.16,87.76 50.55,87.38 51.18,87.38 51.32,87.23 51.32,86.54 C1.1 | U11.3 48.29,101.95 v48.26,101.98 47.24,101.98 46.99,101.73 46.99,99.44 47.3,99.13 U11.1 | v68.58,103.89 70.23,103.89 70.7,103.42 R20.2 | JP25.3 v86.36,97.54 | JP25.4 v96.52,97.54 | JP26.3 v86.36,87.38 | JP26.4 v96.52,87.38 | U9.20 56.17,74.59 55.88,74.3 54.23,74.3 v53.47,73.53 53.47,72.9 53.33,72.76 C11.1 | JP23.3 15.24,97.54 JP29.9 | v27.94,97.54 JP23.4 | JP24.3 v17.78,87.38 | JP24.4 v27.94,87.38 | C16.A 24.03,60.96 U10.5 25.08,61.03 v25.4,60.71 | v59.69,84.84 60.42,84.11 U7.18 62.33,84.11 62.36,84.07 C10.1 | v66.29,77.85 65.67,77.09 R14.1
  Top 0.254: C1.1 52.84,86.49 U7.4 54.35,86.51 | U7.6 53.91,84.91 v54.61,84.2 | v63.5,68.83 63.82,69.15 U12.5 63.84,70.23 64.64,70.23 64.77,70.1 R26.2 | R25.2 66.71,74.38 v67.18,73.91
  other vias: 25.4,61.98 25.4,63.25 55.12,86.61
  pour 5V (isolate 0.305): 12.7,106.43 101.6,106.43 arc-90 104.14,103.89 104.14,59.44 arc-90 101.6,56.9 12.7,56.9 arc-90 10.16,59.44 10.16,103.89 arc-90
FT232_RXI  (via drill 0.51)
  Top 0.254: U5.5 72.8,23.72 v72.14,22.86 | v64.77,53.85 R3.1
  Gnd 0.254: v72.14,22.86 71.88,53.09 71.12,53.85 69.85,52.58 67.31,52.58 66.04,53.85 v64.77,53.85
FT232_RXI1  (via drill 0.51)
  Top 0.254: U8.5 72.8,73.76 v72.14,72.9 | v64.77,103.89 R16.1
  Gnd 0.254: v72.14,72.9 71.88,103.12 71.12,103.89 69.85,102.62 67.31,102.62 66.04,103.89 v64.77,103.89
FT232_TXO  (via drill 0.51)
  Top 0.254: U5.1 75.09,26.32 v75.56,26.8 | v51.44,52.2 51.44,53.83 R2.1
  5V 0.254: v75.56,26.8 75.56,41.78 74.93,42.42 72.39,42.42 71.12,43.69 71.12,46.23 69.85,47.5 53.34,47.5 52.07,48.77 52.07,51.56 v51.44,52.2
FT232_TXO1  (via drill 0.51)
  Top 0.254: U8.1 75.09,76.36 v75.56,76.83 | v51.44,102.23 51.44,103.87 R15.1
  5V 0.254: v75.56,76.83 75.56,91.82 74.93,92.46 72.39,92.46 71.12,93.73 71.12,96.27 69.85,97.54 53.34,97.54 52.07,98.81 52.07,101.6 v51.44,102.23
FTDI_DTR
  Top 0.254: U5.2 72.54,25.67 72.01,25.15 72.01,24.38 67.8,20.18 U6.1 65.72,17.84 65.53,17.65 64.78,17.65 R13.1
FTDI_DTR1
  Top 0.254: U8.2 72.54,75.71 72.01,75.18 72.01,74.42 67.8,70.22 U12.1 65.72,67.88 65.53,67.69 64.78,67.69 R26.1
GND  (via drill 0.38, 0.51)
  Top 0.254: 46.99,44.96 46.88,44.85 C6.2 v48.39,44.58 C8.C | U4.2 v49.66,50.04 | S1.3 31.78,16.73 v31.62,16.76 | C9.C v17.4,10.92 | U2.18 57.48,24.33 57.4,24.26 | C4.2 v50.67,24 | MOD1.10 47.65,23.14 v47.62,22.86 | Y1.2 v48.77,33.53 | U1.5 v54.25,35.67 v54.26,35.66 | U1.21 60.12,36.47 v60.06,36.46 | U5.21 79.69,21.77 v79.38,21.72 | U5.7 75.11,22.42 v75.31,22.35 | U5.25 v79.64,24.37 v79.63,24.38 | U5.18 79.64,19.82 v79.63,19.81 | D4.C 73.65,30.24 v73.66,30.23 | C3.2 v64.64,35.31 | S4.1 v31.24,40.51 | U1.3 v54.25,37.27 v54.26,37.26 | D6.C v65.02,52.58 | S1.6 33.06,24.13 | 33.06,24.13 S2.3 | v31.75,24 32.93,24 33.06,24.13
  Top 0.305: JP4.GND 94.54,24.97 v94.49,25.02 | U3.2 v28.07,11.94 | Q1.1 28.92,26.83 v29.72,26.04
  Top 1.016: JP9.6 v83.82,44.96 | JP8.5 v30.48,44.96 | JP8.6 v40.64,44.96 | v17.4,16.38 17.41,16.4 JP3.P$4 22.72,16.4 v24,16.38 | JP10.6 v27.94,44.96 | JP10.5 v17.78,44.96 | JP11.6 v27.94,34.8 | JP11.5 v17.78,34.8 | JP12.6 v96.52,44.96 | JP13.6 v96.52,34.8 | JP13.5 v86.36,34.8 | JP12.5 v86.36,44.96 | JP9.5 v73.66,44.96
  Top 1.27: v17.4,16.38 13.98,16.38 JP3.GND
  other vias: 55.88,23.37 58.42,23.37 60.96,23.37 60.96,20.83 58.42,20.83 55.88,20.83 48.9,37.72
  pour Gnd (isolate 0.305): 12.7,56.39 101.6,56.39 arc-90 104.14,53.85 104.14,9.4 arc-90 101.6,6.86 12.7,6.86 arc-90 10.16,9.4 10.16,53.85 arc-90
  pour Bottom (isolate 0.305): 12.7,56.39 101.6,56.39 arc-90 104.14,53.85 104.14,9.4 arc-90 101.6,6.86 12.7,6.86 arc-90 10.16,9.4 10.16,53.85 arc-90
  pour Top (isolate 0.305): 54.74,17.78 59.56,17.78 59.56,19.43 59.69,19.56 61.34,19.56 61.34,24.64 57.4,24.64 56.64,23.88 54.74,23.88
  pour Top (isolate 0.305, rank 2): 12.7,56.39 101.6,56.39 arc-90 104.14,53.85 104.14,9.4 arc-90 101.6,6.86 12.7,6.86 arc-90 10.16,9.4 10.16,53.85 arc-90
GND1  (via drill 0.38, 0.51)
  Top 0.254: 46.99,95 46.88,94.88 C13.2 v48.39,94.61 v48.39,94.62 C15.C | U11.2 v49.66,100.08 | S6.3 31.78,66.77 v31.62,66.8 | C16.C v17.4,60.96 | U9.18 57.48,74.37 57.4,74.3 | C11.2 v50.67,74.04 | MOD2.10 47.65,73.18 v47.62,72.9 | Y2.2 v48.77,83.57 | U7.5 v54.25,85.71 v54.26,85.7 | U7.21 60.12,86.51 v60.06,86.5 | U8.21 79.69,71.81 v79.38,71.75 | U8.7 75.11,72.46 v75.31,72.39 | U8.25 v79.64,74.41 v79.63,74.42 | U8.18 79.64,69.86 v79.63,69.85 | D10.C 73.65,80.28 v73.66,80.26 | C10.2 v64.64,85.34 | S9.1 v31.24,90.55 | U7.3 v54.25,87.31 v54.26,87.3 | D12.C v65.02,102.62 | S6.6 33.06,74.17 | 33.06,74.17 S7.3 | v31.75,74.04 32.93,74.04 33.06,74.17
  Top 0.305: JP18.GND 94.54,75.01 v94.49,75.06 | U10.2 v28.07,61.98 | Q2.1 28.92,76.87 v29.72,76.07
  Top 1.016: JP22.6 v83.82,95 | JP21.5 v30.48,95 | JP21.6 v40.64,95 | v17.4,66.42 17.41,66.44 JP17.P$4 22.72,66.44 v24,66.42 | JP23.6 v27.94,95 | JP23.5 v17.78,95 | JP24.6 v27.94,84.84 | JP24.5 v17.78,84.84 | JP25.6 v96.52,95 | JP26.6 v96.52,84.84 | JP26.5 v86.36,84.84 | JP25.5 v86.36,95 | JP22.5 v73.66,95
  Top 1.27: v17.4,66.42 13.98,66.42 JP17.GND
  other vias: 55.88,73.41 58.42,73.41 60.96,73.41 60.96,70.87 58.42,70.87 55.88,70.87 48.9,87.76
  pour Gnd (isolate 0.305): 12.7,106.43 101.6,106.43 arc-90 104.14,103.89 104.14,59.44 arc-90 101.6,56.9 12.7,56.9 arc-90 10.16,59.44 10.16,103.89 arc-90
  pour Bottom (isolate 0.305): 12.7,106.43 101.6,106.43 arc-90 104.14,103.89 104.14,59.44 arc-90 101.6,56.9 12.7,56.9 arc-90 10.16,59.44 10.16,103.89 arc-90
  pour Top (isolate 0.305): 54.74,67.82 59.56,67.82 59.56,69.47 59.69,69.6 61.34,69.6 61.34,74.68 57.4,74.68 56.64,73.91 54.74,73.91
  pour Top (isolate 0.305, rank 2): 12.7,106.43 101.6,106.43 arc-90 104.14,103.89 104.14,59.44 arc-90 101.6,56.9 12.7,56.9 arc-90 10.16,59.44 10.16,103.89 arc-90
L01
  Top 1.27: JP1.1 50.67,14.48 49.53,13.34 49.53,10.67 50.8,9.4 JP1.3 JP15.2
  pour Top (isolate 0.305): 53.34,19.18 54.36,19.18 54.36,13.97 51.56,13.97 51.56,15.11 51.44,15.11 53.34,17.02
L02
  pour Top (isolate 0.305): 56.01,19.18 56.9,19.18 56.9,12.45 55.88,11.43 51.56,11.43 51.56,12.57 54.74,12.57 56.01,13.84
L03
  Top 1.27: JP19.1 50.67,64.52 49.53,63.37 49.53,60.71 50.8,59.44 JP19.3 JP31.2
  pour Top (isolate 0.305): 53.34,69.22 54.36,69.22 54.36,64.01 51.56,64.01 51.56,65.15 51.44,65.15 53.34,67.06
L04
  pour Top (isolate 0.305): 56.01,69.22 56.9,69.22 56.9,62.48 55.88,61.47 51.56,61.47 51.56,62.61 54.74,62.61 56.01,63.88
L_CTRL_1  (via drill 0.38)
  Top 0.254: U2.21 55.52,27.33 v55.88,27.69 | v54.36,38.86 U1.32
  Bottom 0.254: v55.88,27.69 56.26,28.07 56.26,36.96 v54.36,38.86
L_CTRL_2  (via drill 0.38)
  Top 0.254: U1.2 51.47,38.07 v51.44,38.1 | U2.22 54.88,27.8 55.12,28.05 v55.12,28.57
  Bottom 0.254: v51.44,38.1 52.96,36.58 52.96,30.73 v55.12,28.57
L_CTRL_3  (via drill 0.38)
  Top 0.254: U7.2 51.47,88.11 v51.44,88.14 | U9.22 54.88,77.84 55.12,78.08 v55.12,78.61
  Bottom 0.254: v51.44,88.14 52.96,86.61 52.96,80.77 v55.12,78.61
L_CTRL_4  (via drill 0.38)
  Top 0.254: U9.21 55.52,77.37 v55.88,77.72 | v54.36,88.9 U7.32
  Bottom 0.254: v55.88,77.72 56.26,78.11 56.26,87 v54.36,88.9
MISO  (via drill 0.51)
  Top 0.254: U1.16 60.68,31.77 61.21,31.24 68.71,31.24 v69.34,30.61 | v73.91,32.26 79.38,32.26 80.01,32.89 JP5.1 | v87.63,30.35 S5.3
  5V 0.254: v69.34,30.61 72.26,30.61 v73.91,32.26 | JP5.1 80.52,34.8 84.96,30.35 v87.63,30.35
MISO1  (via drill 0.51)
  Top 0.254: U7.16 60.68,81.81 61.21,81.28 68.71,81.28 v69.34,80.64 | v73.91,82.3 79.38,82.3 80.01,82.93 JP27.1 | v87.63,80.39 S10.3
  5V 0.254: v69.34,80.64 72.26,80.64 v73.91,82.3 | JP27.1 80.52,84.84 84.96,80.39 v87.63,80.39
MOTOR_ENABLE  (via drill 0.38)
  Top 0.254: S2.2 v35.56,26.92 S1.5 | U2.19 56.83,27.12 v57.08,27.38
  5V 0.254: v57.08,27.38 57.08,23.3 56.26,22.48 48.64,22.48 48.13,21.97 47.12,21.97 46.61,22.48 38.35,22.48 35.56,25.27 v35.56,26.92
MOTOR_ENABLE1  (via drill 0.38)
  Top 0.254: S7.2 v35.56,76.96 S6.5 | U9.19 56.83,77.16 v57.08,77.41
  5V 0.254: v57.08,77.41 57.08,73.33 56.26,72.52 48.64,72.52 48.13,72.01 47.12,72.01 46.61,72.52 38.35,72.52 35.56,75.31 v35.56,76.96
N$1
  Top 0.254: S3.2 61.96,51.31 R4.2
N$2
  Top 0.305: Q1.8 Q1.7 23.18,29.39 22.86,29.72 22.86,31.75 23.37,32.26 R11.1 26.02,33.13 26.29,33.4 28.19,33.4 28.92,32.67 Q1.4
N$3
  Top 0.254: R6.1 D5.C
N$4
  Top 0.254: R5.1 D3.C
N$5
  Top 0.254: U6.4 63.82,22.04 64.98,23.2 C7.2
N$6
  pour Top (isolate 0.305): 104.14,32.26 92.71,32.26 92.71,15.75 104.14,15.75
N$7
  Top 0.254: D4.A R7.1
N$8
  Top 0.254: D6.A R8.1
N$9  (via drill 0.51)
  Top 0.305: Q1.5 Q1.6 25.73,30.04 v25.91,30.23
  Top 1.016: F1.2 v30.48,32.26
  Gnd 1.016: v30.48,32.26 26.67,32.26 25.91,31.5 v25.91,30.23
N$10
  Top 0.254: U8.16 89.14,68.56 93.18,72.61 JP18.D-
N$11  (via drill 0.51)
  Top 0.254: U8.15 91.41,67.91 v91.44,67.94 | JP18.D+ 91.69,73.41 v91.44,73.15
  5V 0.254: v91.44,67.94 v91.44,73.15
N$12
  Top 0.254: U7.8 51.94,83.31 51,82.37 Y2.3
N$13
  Top 0.254: U7.7 51.91,84.11 51.25,84.77 Y2.1
N$14
  Top 0.254: D10.A R19.1
N$15
  Top 0.254: D12.A R20.1
N$16
  Top 0.254: S7.1 41.56,75.66 41.91,75.31 R21.1
N$17
  Top 0.254: U12.4 63.82,72.08 64.98,73.24 C14.2
N$18
  Top 0.254: S2.1 41.56,25.62 41.91,25.27 R9.1
N$19
  Top 0.254: S8.2 61.96,101.35 R23.2
N$20
  pour Top (isolate 0.305): 104.14,82.3 92.71,82.3 92.71,65.79 104.14,65.79
N$21
  Top 0.305: Q2.8 Q2.7 23.18,79.43 22.86,79.76 22.86,81.79 23.37,82.3 R24.1 26.02,83.17 26.29,83.44 28.19,83.44 28.92,82.71 Q2.4
N$22
  Top 0.254: R18.1 D11.C
N$23
  Top 0.254: U1.8 51.94,33.27 51,32.33 Y1.3
N$24
  Top 0.254: U1.7 51.91,34.07 51.25,34.73 Y1.1
N$25
  Top 0.254: R17.1 D9.C
N$26
  Top 0.254: U5.16 89.14,18.52 93.18,22.57 JP4.D-
N$27  (via drill 0.51)
  Top 0.254: U5.15 91.41,17.87 v91.44,17.91 | JP4.D+ 91.69,23.37 v91.44,23.11
  5V 0.254: v91.44,17.91 v91.44,23.11
N$28  (via drill 0.51)
  Top 0.305: Q2.5 Q2.6 25.73,80.08 v25.91,80.26
  Top 1.016: F2.2 v30.48,82.3
  Gnd 1.016: v30.48,82.3 26.67,82.3 25.91,81.53 v25.91,80.26
PG_EN
  Top 0.254: S1.1 39.96,16.73 R10.1
PG_EN1
  Top 0.254: S6.1 39.96,66.77 R22.1
PROGRAM_ENABLE
  Top 0.254: U3.3 29.34,12.89 33.97,12.89 35.56,14.48 S1.2
  Top 0.305: Q1.2 27.87,29.39 27.43,28.96 27.43,26.16 29.21,24.38 29.21,13.02 29.34,12.89
PROGRAM_ENABLE1
  Top 0.254: U10.3 29.34,62.93 33.97,62.93 35.56,64.52 S6.2
  Top 0.305: Q2.2 27.87,79.43 27.43,78.99 27.43,76.2 29.21,74.42 29.21,63.05 29.34,62.93
PWML
  Top 0.203: U1.9 54.35,28.45 54.36,28.45 54.23,28.32 U2.23
PWML1
  Top 0.203: U7.9 54.35,78.49 54.36,78.49 54.23,78.36 U9.23
PWMR  (via drill 0.25)
  Top 0.203: U1.10 55.15,30 v55.12,29.97 | v57.53,29.59 58.29,29.59 59.42,28.46 U2.15
  5V 0.203: v55.12,29.97 57.15,29.97
  5V 0.254: 57.15,29.97 v57.53,29.59
PWMR1  (via drill 0.25)
  Top 0.203: U7.10 55.15,80.04 v55.12,80.01 | v57.53,79.63 58.29,79.63 59.42,78.5 U9.15
  5V 0.203: v55.12,80.01 57.15,80.01
  5V 0.254: 57.15,80.01 v57.53,79.63
R01
  Top 1.27: JP14.2 JP2.1 63.5,9.4 64.77,10.67 64.77,13.21 63.5,14.48 JP2.3
  pour Top (isolate 0.305): 59.94,19.18 60.96,19.18 60.96,17.02 62.87,15.11 62.87,13.97 59.94,13.97
R02
  pour Top (isolate 0.305): 57.4,19.18 58.29,19.18 58.29,13.84 59.56,12.57 62.74,12.57 62.74,11.43 58.42,11.43 57.4,12.45
R03
  pour Top (isolate 0.305): 57.4,69.22 58.29,69.22 58.29,63.88 59.56,62.61 62.74,62.61 62.74,61.47 58.42,61.47 57.4,62.48
R04
  Top 1.27: JP30.2 JP20.1 63.5,59.44 64.77,60.71 64.77,63.25 63.5,64.52 JP20.3
  pour Top (isolate 0.305): 59.94,69.22 60.96,69.22 60.96,67.06 62.87,65.15 62.87,64.01 59.94,64.01
R_CTRL_1
  Top 0.203: U2.17 58.12,28.11 57.91,28.32 56.64,28.32 55.95,29.01 U1.11
R_CTRL_2
  Top 0.203: U1.12 56.75,29.1 57.02,28.83 58.17,28.83 58.77,28.22 U2.16
R_CTRL_3
  Top 0.203: U9.17 58.12,78.15 57.91,78.36 56.64,78.36 55.95,79.05 U7.11
R_CTRL_4
  Top 0.203: U7.12 56.75,79.14 57.02,78.87 58.17,78.87 58.77,78.26 U9.16
RESET  (via drill 0.51)
  Top 0.203: R1.2 63.28,28.49 v63.5,28.7 | C7.1 63.28,24.8 v62.48,24
  Top 0.254: v71.12,27.18 73.66,27.18 74.93,28.45 74.93,29.72 76.2,30.99 82.55,30.99 83.82,32.26 83.82,38.61 82.55,39.88 JP5.5 | U1.29 v56.75,38.88 | v35.56,36.7 S4.3 | R1.2 C7.1
  5V 0.254: v62.48,24 63.5,24 64.26,24.77 68.71,24.77 v71.12,27.18
  Gnd 0.254: v63.5,28.7 63.5,33.53 62.23,34.8 62.23,37.34 61.85,37.72 57.91,37.72 v56.75,38.88 56.75,40.02 56.26,40.51 52.32,40.51 50.67,38.86 48.9,38.86 47.12,37.08 35.94,37.08 v35.56,36.7
RESET1  (via drill 0.51)
  Top 0.203: R14.2 63.28,78.53 v63.5,78.74 | C14.1 63.28,74.84 v62.48,74.04
  Top 0.254: v71.12,77.22 73.66,77.22 74.93,78.49 74.93,79.76 76.2,81.03 82.55,81.03 83.82,82.3 83.82,88.65 82.55,89.92 JP27.5 | U7.29 v56.75,88.92 | v35.56,86.74 S9.3 | R14.2 C14.1
  5V 0.254: v62.48,74.04 63.5,74.04 64.26,74.8 68.71,74.8 v71.12,77.22
  Gnd 0.254: v63.5,78.74 63.5,83.57 62.23,84.84 62.23,87.38 61.85,87.76 57.91,87.76 v56.75,88.92 56.75,90.06 56.26,90.55 52.32,90.55 50.67,88.9 48.9,88.9 47.12,87.12 35.94,87.12 v35.56,86.74
RXI
  Top 0.254: R2.2 52.76,53.81 S3.4 54.33,53.05 53.98,52.7 53.34,52.7 52.83,52.2 52.83,49.53 50.8,47.5 50.8,46.74 54.23,43.31 55.5,43.31 55.95,42.86 U1.30
RXI1
  Top 0.254: R15.2 52.76,103.85 S8.4 54.33,103.09 53.98,102.74 53.34,102.74 52.83,102.23 52.83,99.57 50.8,97.54 50.8,96.77 54.23,93.34 55.5,93.34 55.95,92.89 U7.30
RXLED
  Top 0.254: U5.22 82.1,22.42 82.42,22.1 R5.2
RXLED1
  Top 0.254: U8.22 82.1,72.46 82.42,72.14 R17.2
SCK
  Top 0.254: U1.17 61.44,32.54 61.72,32.26 67.31,32.26 69.72,34.67 70.74,34.67 72.14,36.07 72.39,36.07 | 72.39,36.07 78.74,36.07 JP5.3 | R7.2 72.39,36.07
SCK1
  Top 0.254: U7.17 61.44,82.58 61.72,82.3 67.31,82.3 69.72,84.71 70.74,84.71 72.14,86.11 72.39,86.11 | 72.39,86.11 78.74,86.11 JP27.3 | R19.2 72.39,86.11
SENSOR_0/SW_TXO  (via drill 0.51)
  Top 0.254: U1.23 62.96,38.07 63.5,38.61 v63.5,45.72 63.5,48.26 62.95,48.81 S3.3 | v17.65,50.04 JP10.1
  5V 0.254: v63.5,45.72 41.78,45.72 41.66,45.85 39.5,45.85 37.59,43.69 21.21,43.69 17.65,47.24 v17.65,50.04
SENSOR_0/SW_TXO1  (via drill 0.51)
  Top 0.254: U7.23 62.96,88.11 63.5,88.65 v63.5,95.76 63.5,98.3 62.95,98.85 S8.3 | v17.65,100.08 JP23.1
  5V 0.254: v63.5,95.76 41.78,95.76 41.66,95.89 39.5,95.89 37.59,93.73 21.21,93.73 17.65,97.28 v17.65,100.08
SENSOR_1  (via drill 0.38, 0.51)
  Top 0.254: U7.25 59.95,91.56 59.82,91.69 v59.18,91.69 | v17.78,89.92 JP24.1
  5V 0.254: v59.18,91.69 55.63,91.69 55.37,91.44 18.54,91.44 17.78,90.68 v17.78,89.92
SENSOR_1/SW_RXI  (via drill 0.51)
  Top 0.254: U1.24 61.44,47.02 60.96,47.5 54.23,47.5 | S3.6 54.33,47.59 54.23,47.5 | 54.23,47.5 v52.07,47.5 | v27.94,50.04 JP10.2
  Gnd 0.254: v52.07,47.5 44.45,47.5 40.64,51.31 29.21,51.31 v27.94,50.04
SENSOR_1/SW_RXI1  (via drill 0.51)
  Top 0.254: U7.24 61.44,97.05 60.96,97.54 54.23,97.54 | S8.6 54.33,97.63 54.23,97.54 | 54.23,97.54 v52.07,97.54 | v27.94,100.08 JP23.2
  Gnd 0.254: v52.07,97.54 44.45,97.54 40.64,101.35 29.21,101.35 v27.94,100.08
SENSOR_2  (via drill 0.38, 0.51)
  Top 0.254: U1.25 59.95,41.52 59.82,41.66 v59.18,41.66 | v17.78,39.88 JP11.1
  5V 0.254: v59.18,41.66 55.63,41.66 55.37,41.4 18.54,41.4 17.78,40.64 v17.78,39.88
SENSOR_3  (via drill 0.38, 0.51)
  Top 0.254: U1.26 59.15,39.15 v59.69,38.61 | v27.94,39.88 JP11.2
  5V 0.254: v59.69,38.61 58.42,38.61 57.15,37.34 56.13,37.34 55.5,37.97 55.5,39.5 55.12,39.88 51.94,39.88 51.82,39.75 51.44,39.75 50.55,38.86 49.4,38.86 48.39,39.88 32.64,39.88 32.13,39.37 28.45,39.37 v27.94,39.88
SENSOR_4  (via drill 0.51)
  Top 0.254: U1.27 58.35,42.09 58.8,42.55 v60.45,42.55 | v64.52,42.55 64.52,50.16 65.66,51.31 71.12,51.31 73.66,53.85 87.63,53.85 88.9,52.58 JP12.1
  Bottom 0.254: v60.45,42.55 v64.52,42.55
SENSOR_5  (via drill 0.51)
  Top 0.254: U1.28 57.55,43.33 58.17,43.94 v60.45,43.94 | v66.04,43.94 66.04,49.91 66.55,50.42 71.63,50.42 74.42,53.21 87,53.21 v87.63,52.58 | v90.17,52.58 93.6,52.58 93.98,52.2 JP12.2
  Bottom 0.254: v60.45,43.94 v66.04,43.94 | v87.63,52.58 v90.17,52.58
SENSOR_6
  Top 0.254: U1.19 62.43,34.87 62.99,35.43 62.99,36.07 63.5,36.58 67.56,36.58 68.58,37.59 74.93,37.59 75.31,37.97 75.31,40.51 76.45,41.66 82.8,41.66 84.58,39.88 JP13.1
SENSOR_7
  Top 0.254: U1.22 63.43,37.27 65.41,39.24 67.94,39.24 68.45,38.73 74.04,38.73 74.42,39.12 74.42,40.77 76.07,42.42 83.19,42.42 84.58,41.02 93.6,41.02 93.98,40.64 JP13.2
SENSOR_8  (via drill 0.38, 0.51)
  Top 0.254: U7.26 59.15,89.19 v59.69,88.65 | v27.94,89.92 JP24.2
  5V 0.254: v59.69,88.65 58.42,88.65 57.15,87.38 56.13,87.38 55.5,88.01 55.5,89.53 55.12,89.92 51.94,89.92 51.82,89.79 51.44,89.79 50.55,88.9 49.4,88.9 48.39,89.92 32.64,89.92 32.13,89.41 28.45,89.41 v27.94,89.92
SENSOR_9  (via drill 0.51)
  Top 0.254: U7.27 58.35,92.13 58.8,92.58 v60.45,92.58 | v64.52,92.58 64.52,100.2 65.66,101.35 71.12,101.35 73.66,103.89 87.63,103.89 88.9,102.62 JP25.1
  Bottom 0.254: v60.45,92.58 v64.52,92.58
SENSOR_10  (via drill 0.51)
  Top 0.254: U7.28 57.55,93.36 58.17,93.98 v60.45,93.98 | v66.04,93.98 66.04,99.95 66.55,100.46 71.63,100.46 74.42,103.25 87,103.25 v87.63,102.62 | v90.17,102.62 93.6,102.62 93.98,102.23 JP25.2
  Bottom 0.254: v60.45,93.98 v66.04,93.98 | v87.63,102.62 v90.17,102.62
SENSOR_11
  Top 0.254: U7.19 62.43,84.91 62.99,85.47 62.99,86.11 63.5,86.61 67.56,86.61 68.58,87.63 74.93,87.63 75.31,88.01 75.31,90.55 76.45,91.69 82.8,91.69 84.58,89.92 JP26.1
SENSOR_12
  Top 0.254: U7.22 63.43,87.31 65.41,89.28 67.94,89.28 68.45,88.77 74.04,88.77 74.42,89.15 74.42,90.81 76.07,92.46 83.19,92.46 84.58,91.06 93.6,91.06 93.98,90.68 JP26.2
SERVO_1
  Top 0.254: U1.1 51.94,38.87 51.82,38.99 49.02,38.99 47.37,37.34 46.48,37.34 45.85,36.7 43.56,36.7 42.67,37.59 42.67,40.64 40.26,43.05 30.73,43.05 29.21,44.58 29.21,49.28 29.97,50.04 JP8.1
SERVO_2  (via drill 0.51)
  Top 0.254: U1.13 57.55,33 57.28,33.27 57.28,35.31 v58.04,36.07 | v53.34,42.42 46.99,42.42 45.34,40.77 43.69,40.77 43.18,41.27 43.18,48.26 41.4,50.04 JP8.2
  Bottom 0.254: v58.04,36.07 58.04,42.8 57.15,43.69 54.61,43.69 v53.34,42.42
SERVO_3  (via drill 0.51)
  Top 0.254: U1.14 58.35,33.46 v58.42,33.53 | v76.2,52.2 JP9.1
  Bottom 0.254: v58.42,33.53 70.36,33.53 71.25,34.42 71.25,49.66 71.63,50.04 74.04,50.04 v76.2,52.2
SERVO_4
  Top 0.254: U7.1 51.94,88.91 51.82,89.03 49.02,89.03 47.37,87.38 46.48,87.38 45.85,86.74 43.56,86.74 42.67,87.63 42.67,90.68 40.26,93.09 30.73,93.09 29.21,94.61 29.21,99.31 29.97,100.08 JP21.1
SERVO_4/MOSI  (via drill 0.51)
  Top 0.254: U1.15 59.15,30.89 59.56,30.48 60.83,30.48 v61.21,30.1 | JP9.2 81.28,51.56 v81.79,52.07
  Bottom 0.254: v61.21,30.1 67.44,30.1 69.22,31.88 72.52,31.88 73.03,32.38 73.03,35.43 74.93,37.34 | 74.93,37.34 JP5.4 | 74.93,37.34 74.93,41.15 76.2,42.42 81.28,42.42 82.55,43.69 82.55,51.31 v81.79,52.07
SERVO_4/MOSI1  (via drill 0.51)
  Top 0.254: U7.15 59.15,80.93 59.56,80.52 60.83,80.52 v61.21,80.14 | JP22.2 81.28,101.6 v81.79,102.11
  Bottom 0.254: v61.21,80.14 67.44,80.14 69.22,81.92 72.52,81.92 73.03,82.42 73.03,85.47 74.93,87.38 | 74.93,87.38 JP27.4 | 74.93,87.38 74.93,91.19 76.2,92.46 81.28,92.46 82.55,93.73 82.55,101.35 v81.79,102.11
SERVO_5  (via drill 0.51)
  Top 0.254: U7.13 57.55,83.04 57.28,83.31 57.28,85.34 v58.04,86.11 | v53.34,92.46 46.99,92.46 45.34,90.81 43.69,90.81 43.18,91.31 43.18,98.3 41.4,100.08 JP21.2
  Bottom 0.254: v58.04,86.11 58.04,92.84 57.15,93.73 54.61,93.73 v53.34,92.46
SERVO_6  (via drill 0.51)
  Top 0.254: U7.14 58.35,83.5 v58.42,83.57 | v76.2,102.23 JP22.1
  Bottom 0.254: v58.42,83.57 70.36,83.57 71.25,84.45 71.25,99.69 71.63,100.08 74.04,100.08 v76.2,102.23
TXLED
  Top 0.254: U5.23 82.13,23.07 82.42,23.37 R6.2
TXLED1
  Top 0.254: U8.23 82.13,73.11 82.42,73.41 R18.2
TXO  (via drill 0.51)
  Top 0.254: U1.31 55.15,42.13 v54.99,42.29 | S3.1 61.54,53.81 R3.2 61.33,53.83 v61.34,52.58
  Gnd 0.254: v54.99,42.29 54.99,46.61 55.88,47.5 59.69,47.5 60.96,48.77 60.96,52.2 v61.34,52.58
TXO1  (via drill 0.51)
  Top 0.254: U7.31 55.15,92.17 v54.99,92.33 | S8.1 61.54,103.85 R16.2 61.33,103.87 v61.34,102.62
  Gnd 0.254: v54.99,92.33 54.99,96.65 55.88,97.54 59.69,97.54 60.96,98.81 60.96,102.23 v61.34,102.62
V_BATT  (via drill 0.51)
  Top 0.254: U2.24 52.86,25.75 v52.32,25.78 | U2.14 U2.13 61.7,25.75 v61.85,25.78 | R11.2 27.52,30.31 v27.43,30.23 27.61,30.04 Q1.3
  Top 0.305: D1.A 14.36,30.11
  Top 1.016: 14.36,30.11 13.97,29.72 JP3.VIN0
  Top 1.27: D1.A v16.38,30.99
  Gnd 1.016: v16.38,30.99 16.38,27.3 17.78,25.91 26.67,25.91 JP16.2 | 27.43,26.67 31.75,30.99 39.5,30.99 44.7,25.78 v52.32,25.78 v61.85,25.78
  Gnd 1.27: 26.67,25.91 27.43,26.67 v27.43,30.23
V_BATT1  (via drill 0.51)
  Top 0.254: U9.24 52.86,75.79 v52.32,75.82 | U9.14 U9.13 61.7,75.79 v61.85,75.82 | R24.2 27.52,80.35 v27.43,80.26 27.61,80.08 Q2.3
  Top 0.305: D7.A 14.36,80.15
  Top 1.016: 14.36,80.15 13.97,79.76 JP17.VIN0
  Top 1.27: D7.A v16.38,81.03
  Gnd 1.016: v16.38,81.03 16.38,77.34 17.78,75.95 26.67,75.95 JP32.2 | 27.43,76.71 31.75,81.03 39.5,81.03 44.7,75.82 v52.32,75.82 v61.85,75.82
  Gnd 1.27: 26.67,75.95 27.43,76.71 v27.43,80.26
V_GATED  (via drill 0.51)
  Top 1.016: JP8.3 v30.48,47.5 | v83.82,47.5 JP9.4 | JP9.3 v73.66,47.5 | JP8.4 v40.64,47.5 | v29.84,38.35 30.48,37.72 F1.1
  5V 1.016: v30.48,47.5 30.48,53.59 31.62,54.74 40.64,54.74 | 40.64,54.74 55.5,54.74 56.13,55.37 73.66,55.37 | 73.66,55.37 83.57,55.37 84.45,54.48 84.45,47.5 v83.82,47.5 | v73.66,47.5 73.66,55.37 | v40.64,47.5 40.64,54.74
  Gnd 1.016: v29.84,38.35 29.84,42.93 29.21,43.56 29.21,46.23 v30.48,47.5
V_GATED1  (via drill 0.51)
  Top 1.016: JP21.3 v30.48,97.54 | v83.82,97.54 JP22.4 | JP22.3 v73.66,97.54 | JP21.4 v40.64,97.54 | v29.84,88.39 30.48,87.76 F2.1
  5V 1.016: v30.48,97.54 30.48,103.63 31.62,104.78 40.64,104.78 | 40.64,104.78 55.5,104.78 56.13,105.41 73.66,105.41 | 73.66,105.41 83.57,105.41 84.45,104.52 84.45,97.54 v83.82,97.54 | v73.66,97.54 73.66,105.41 | v40.64,97.54 40.64,104.78
  Gnd 1.016: v29.84,88.39 29.84,92.96 29.21,93.6 29.21,96.27 v30.48,97.54
V_IN  (via drill 0.51)
  Top 0.254: U3.1 26.7,9.43 v26.67,9.4 | 41.29,9.51 v41.4,9.4 41.49,9.49 R10.2 41.49,20.03 41.91,20.45 R9.2
  Top 1.016: D2.C 94.37,9.79 v93.98,9.4 | D1.C v20.32,30.99
  5V 1.016: v93.98,9.4 67.31,9.4 62.23,14.48 52.07,14.48 46.99,9.4 v41.4,9.4 v26.67,9.4 22.86,9.4 21.59,10.67 21.59,29.72 v20.32,30.99
V_IN1  (via drill 0.51)
  Top 0.254: U10.1 26.7,59.47 v26.67,59.44 | 41.29,59.55 v41.4,59.44 41.49,59.52 R22.2 41.49,70.06 41.91,70.48 R21.2
  Top 1.016: D8.C 94.37,59.83 v93.98,59.44 | D7.C v20.32,81.03
  5V 1.016: v93.98,59.44 67.31,59.44 62.23,64.52 52.07,64.52 46.99,59.44 v41.4,59.44 v26.67,59.44 22.86,59.44 21.59,60.71 21.59,79.76 v20.32,81.03
V_USB  (via drill 0.51)
  Top 0.203: D3.A 87.49,21.26 87.63,21.12
  Top 0.254: 87.12,21.12 U5.20 80.18,21.12 79.88,20.83 77.22,20.83 76.83,21.21 76.83,24.25 76.96,24.37 | 87.12,21.12 87.63,21.12 89.45,21.12 v90.04,21.72 | JP4.VBUS 94.92,21.77 v93.98,20.83 | U5.4 76.96,24.37 | 87.11,21.14 87.12,21.12 | D5.A D3.A | C5.1 77.89,24.68 77.6,24.38 76.97,24.38 76.96,24.37
  Top 0.813: v93.98,20.83 93.98,16.89 95.25,15.62 97.92,15.62 98.67,14.87 D2.A
  Gnd 0.254: v90.04,21.72 93.09,21.72 v93.98,20.83
V_USB1  (via drill 0.51)
  Top 0.203: D9.A 87.49,71.3 87.63,71.16
  Top 0.254: 87.12,71.16 U8.20 80.18,71.16 79.88,70.87 77.22,70.87 76.83,71.25 76.83,74.28 76.96,74.41 | 87.12,71.16 87.63,71.16 89.45,71.16 v90.04,71.75 | JP18.VBUS 94.92,71.81 v93.98,70.87 | U8.4 76.96,74.41 | 87.11,71.17 87.12,71.16 | D11.A D9.A | C12.1 77.89,74.72 77.6,74.42 76.97,74.42 76.96,74.41
  Top 0.813: v93.98,70.87 93.98,66.93 95.25,65.66 97.92,65.66 98.67,64.91 D8.A
  Gnd 0.254: v90.04,71.75 93.09,71.75 v93.98,70.87
XBEE_DIO1  (via drill 0.51)
  Top 0.254: 68.07,73.03 68.07,72.39 66.55,70.87 U12.2 | 68.07,73.03 68.07,77.6 v67.82,77.85 | v67.82,85.47 68.45,86.11 69.62,86.11 MOD2.17 | R25.1 67.93,72.88 68.07,73.03
  5V 0.254: v67.82,77.85 67.82,78.87 68.2,79.25 68.2,85.09 v67.82,85.47
XBEE_DIO3  (via drill 0.51)
  Top 0.254: 68.07,22.99 68.07,22.35 66.55,20.83 U6.2 | 68.07,22.99 68.07,27.56 v67.82,27.81 | v67.82,35.43 68.45,36.07 69.62,36.07 MOD1.17 | R12.1 67.93,22.84 68.07,22.99
  5V 0.254: v67.82,27.81 67.82,28.83 68.2,29.21 68.2,35.05 v67.82,35.43
XBEE_RXI  (via drill 0.38, 0.51)
  Top 0.254: MOD1.3 46.48,38.1 v46.99,38.61 | v63.5,51.31 63.5,50.29 63.03,49.82 R4.1
  Bottom 0.254: v63.5,51.31 63.5,47.5 62.36,46.23 53.72,46.23 51.94,44.45 51.94,40.51 50.04,38.61 v46.99,38.61
XBEE_RXI1  (via drill 0.38, 0.51)
  Top 0.254: MOD2.3 46.48,88.14 v46.99,88.65 | v63.5,101.35 63.5,100.33 63.03,99.86 R23.1
  Bottom 0.254: v63.5,101.35 63.5,97.54 62.36,96.27 53.72,96.27 51.94,94.49 51.94,90.55 50.04,88.65 v46.99,88.65
XBEE_TXO  (via drill 0.38, 0.51)
  Top 0.254: S3.5 54.33,50.26 v54.1,50.04 | MOD1.2 50.26,40.1 v50.29,40.13
  Bottom 0.254: v54.1,50.04 50.93,50.04 50.8,49.91 50.8,40.64 v50.29,40.13
XBEE_TXO1  (via drill 0.38, 0.51)
  Top 0.254: S8.5 54.33,100.3 v54.1,100.08 | MOD2.2 50.26,90.14 v50.29,90.17
  Bottom 0.254: v54.1,100.08 50.93,100.08 50.8,99.95 50.8,90.68 v50.29,90.17

## Text on the board
Bottom: v14 | v14
tPlace: THIS IS A FOUR-LAYER BOARD! | XBEE HW SERIAL | SENSOR | SERVO | SERVO | SENSOR | A0 | A1 | 3 | 9 | POWER | 10 | 11 | A4 | A5 | 5V | 5V | POW | POW | POW | POW | 5V | 5V | GND | 5V | 5V | GND | XBEE SW SERIAL | GND | GND | GND | GND | GND | GND | GND | GND | SENSOR | SENSOR | A2 | A3 | A6 | A7 | 5V | 5V | 5V | 5V | GND | GND | RESET | GND | GND | MOTOR | D12 BTN | D13 LED | RUN | STOP | V_IN / 6-9V | POWER | TX | RX | ON | + | OFF | LEFT / MOTOR | RIGHT / MOTOR | - | RED | RED | BLACK | BLACK | XBEE HW SERIAL | SENSOR | SERVO | SERVO | SENSOR | A0 | A1 | 3 | 9 | POWER | 10 | 11 | A4 | A5 | 5V | 5V | POW | POW | POW | POW | 5V | 5V | GND | 5V | 5V | GND | XBEE SW SERIAL | GND | GND | GND | GND | GND | GND | GND | GND | SENSOR | SENSOR | A2 | A3 | A6 | A7 | 5V | 5V | 5V | 5V | GND | GND | RESET | GND | GND | MOTOR | D12 BTN | D13 LED | RUN | THIS IS A FOUR-LAYER BOARD! | THIS IS A FOUR-LAYER BOARD! | STOP | V_IN / 6-9V | POWER | TX | RX | ON | + | OFF | LEFT / MOTOR | RIGHT / MOTOR | - | RED | RED | BLACK | BLACK | THIS IS A FOUR-LAYER BOARD!
bPlace: sparkfun.com/redbot | sparkfun.com/redbot